# Altium PCB rotboard.PcbDoc
Units mil, origin at the board's own origin, x right, y up, seen from the top; angles counter-clockwise.
Board outline 2010.03 x 1514.83 mil, 2 copper layers (Top Layer, Bottom Layer); 16 components, 9 nets, 59 pads, 17 vias.
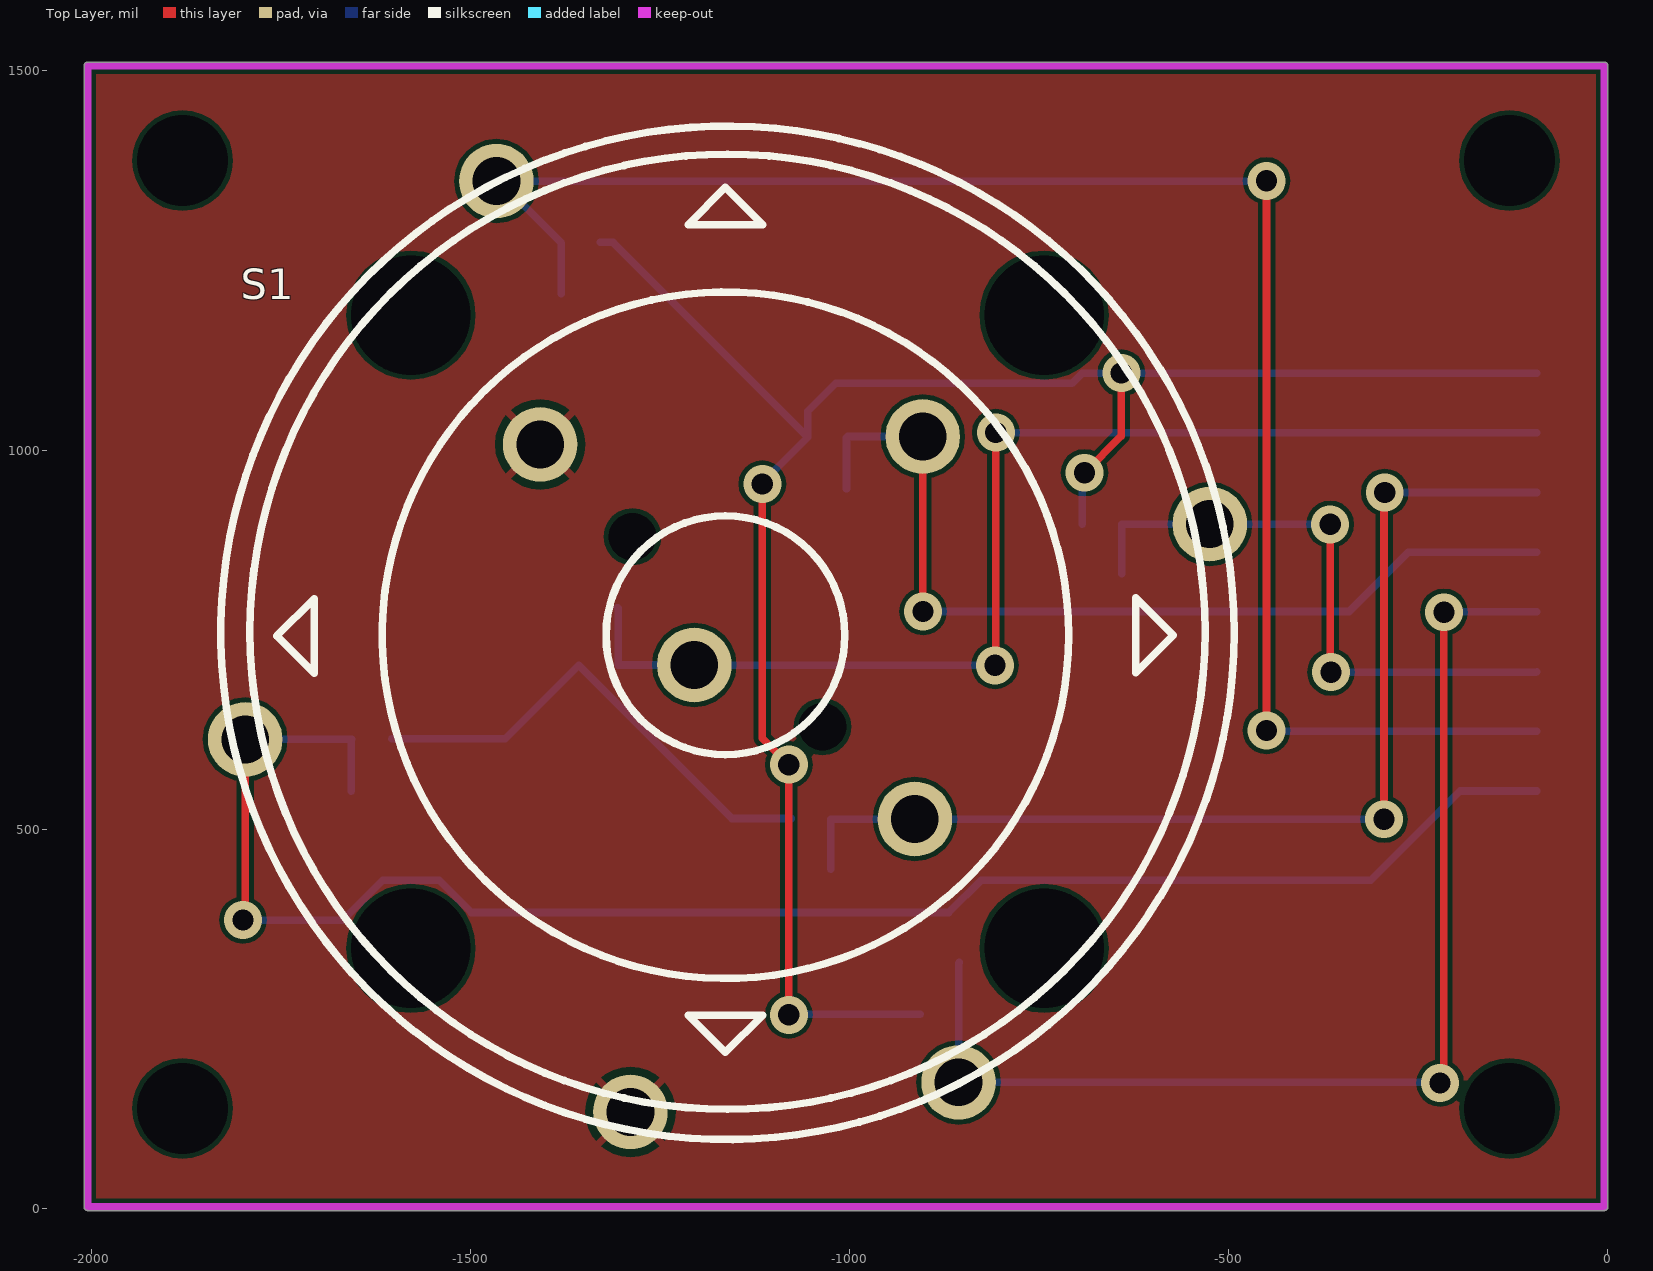
[diagram p0: Top Layer view]
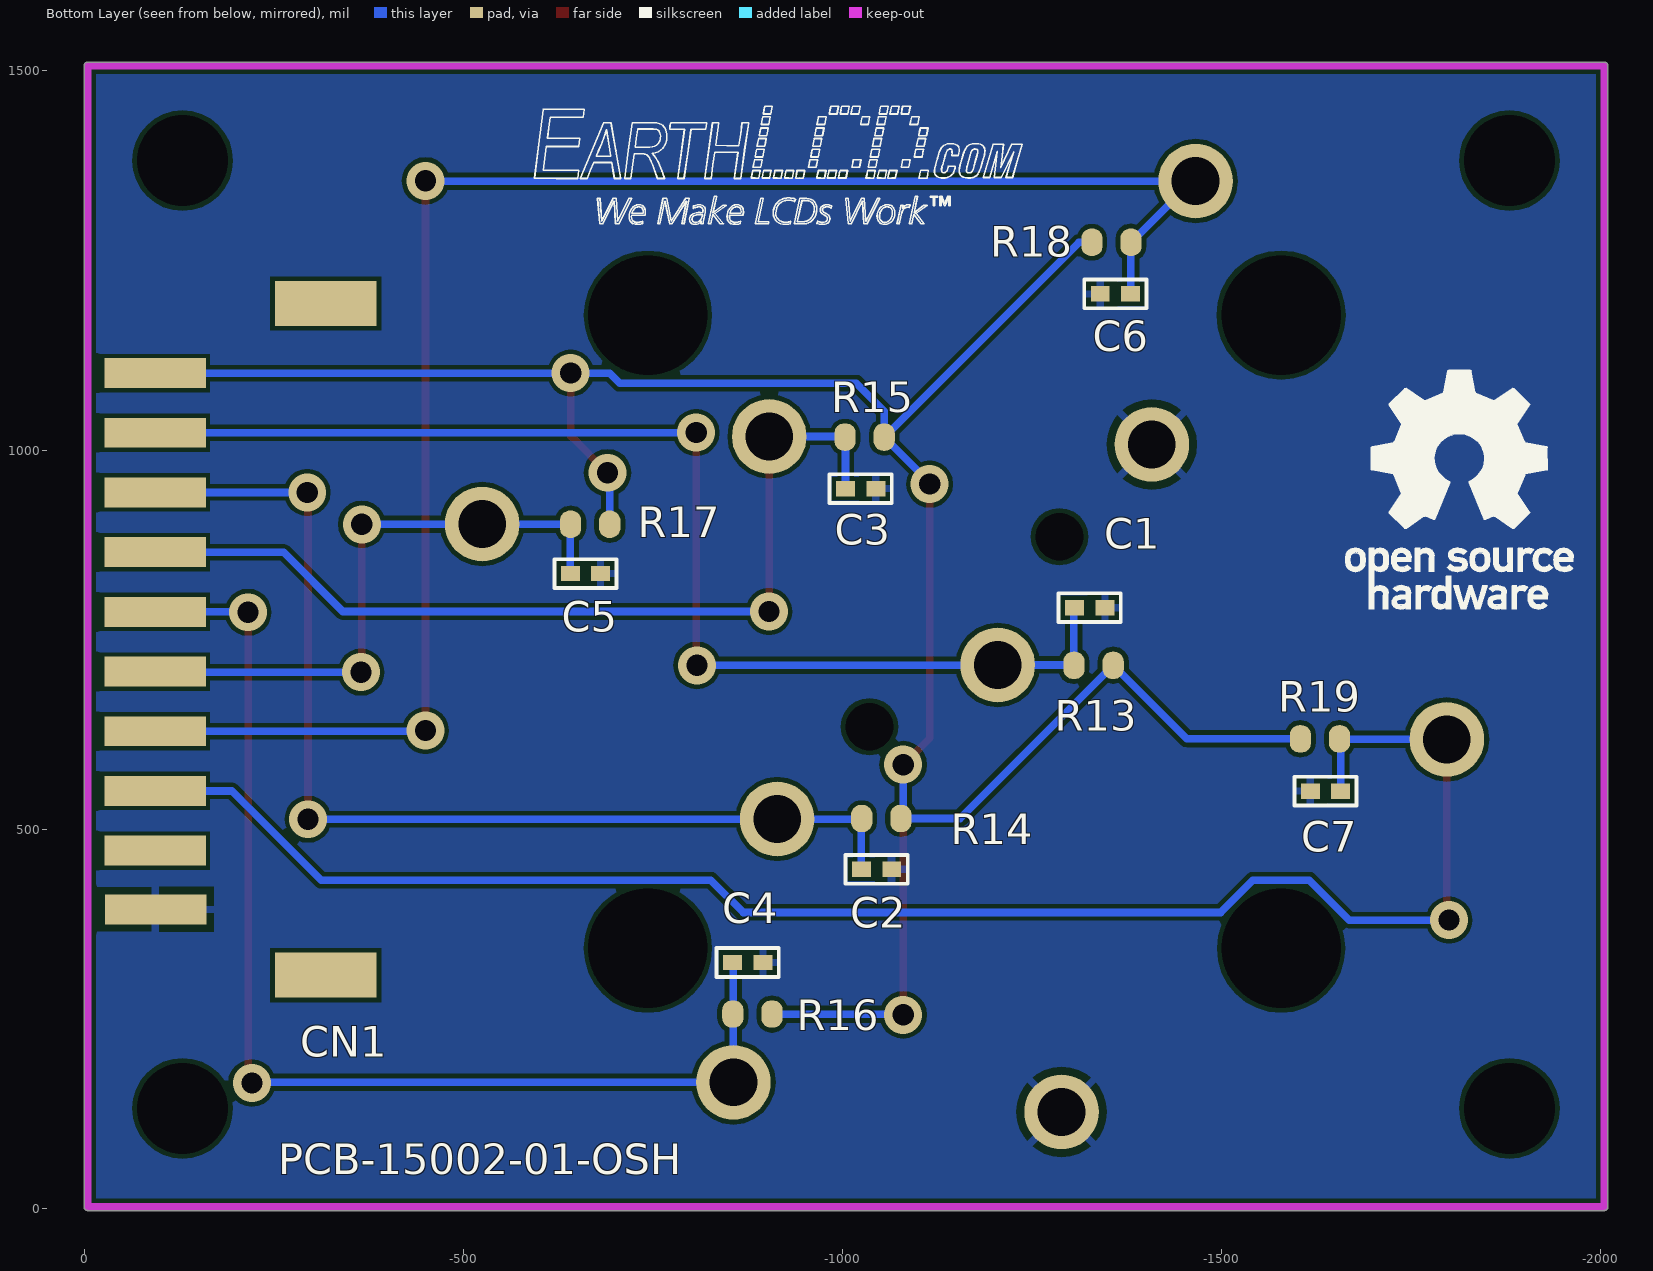
[diagram p1: Bottom Layer view, seen from below]
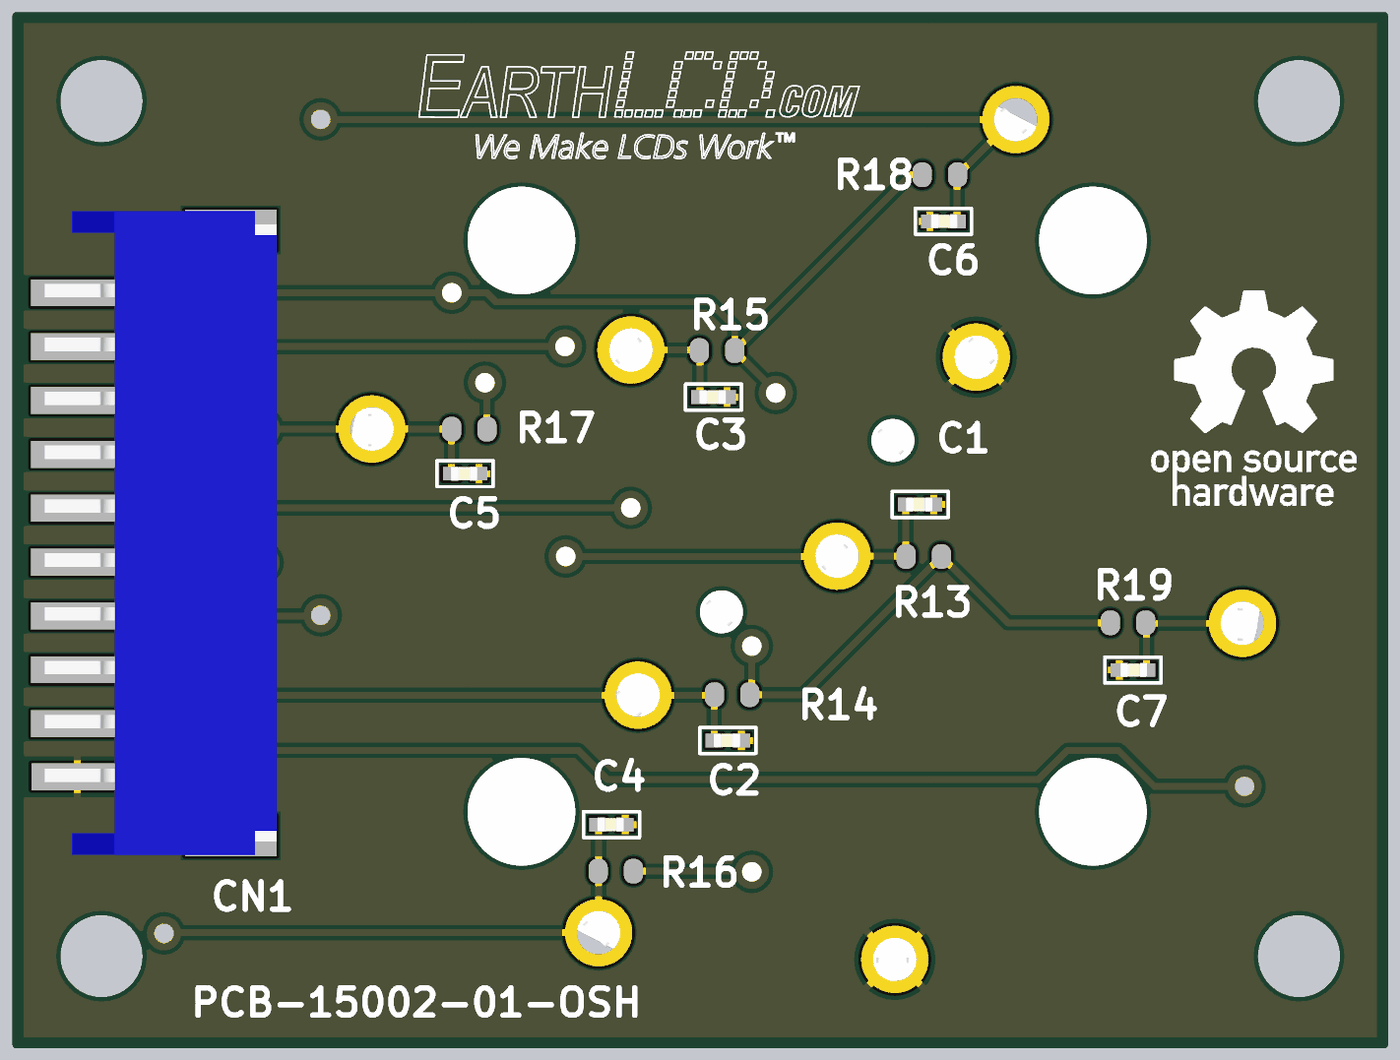
[diagram p2: 3D render of the assembled board from below, using the file's embedded part models]

## Layer stack, top to bottom
Top Solder: solder mask 0.4, Solder Resist, Dk 3.5
Top Layer: signal copper 1.4
Dielectric1: dielectric 12.6, FR-4, Dk 4.8
Bottom Layer: signal copper 1.4
Bottom Solder: solder mask 0.4, Solder Resist, Dk 3.5

## Board outline
-2009.65,1.92 -2009.65,1506.72 cw(c-2004.63,1506.72) -2004.63,1511.74 -4.63,1511.74 cw(c-4.63,1506.72) 0.38,1506.72 0.38,1.92 cw(c-4.63,1.92) -4.63,-3.1 -2004.63,-3.1 cw(c-2004.63,1.92)

## Design rules (kind name [scope] priority, off if disabled: settings)
Clearance [All] p1: gap=6
ComponentClearance [All] p1: gap=5 collisioncheckmode=3 verticalgap=5 showdistances=TRUE
MinimumSolderMaskSliver [All] p1: minsoldermaskwidth=6
PolygonConnect [All] p1: connectstyle=Relief reliefconductorwidth=10 reliefentries=4 polygonreliefangle="90 Angle" airgapwidth=10
RoomDefinition rotboard [InComponentClass('rotboard')] p1: confinementstyle=ConfineIn formatcopy=TRUE lockcomponents=FALSE outline -7777.63,-2698.08 -5777.63,-2698.08 -5777.63,-1698.08 -7777.63,-1698.08
RoutingVias [All] p1: holewidth=28 width=50 viastyle="Through Hole" minholewidth=28 minwidth=50 maxholewidth=28 maxwidth=50
SilkToSolderMaskClearance SilkscreenOverComponentPads [IsPad] p1: minsilkscreentomaskgap=10 clearancetoexposedcopper=TRUE
SolderMaskExpansion [All] p1: expansion=4
Width [All] p1: maxlimit=10 minlimit=10 preferedwidth=10
27 further rules are at their usual default settings.

## Components (designator, comment, footprint, x,y, rotation, side; value= is the part's Value field where it differs from the comment)
C1 ".01uf" 0402C -1306,792 r180 bottom
C2 ".01uf" 0402C -1025,447 r180 bottom
C3 ".01uf" 0402C -1004,949 r180 bottom
C4 ".01uf" 0402C -855,324 r180 bottom
C5 ".01uf" 0402C -641,837 r180 bottom
C6 ".01uf" 0402C -1380,1206 r0 bottom
C7 ".01uf" 0402C -1657,550 r0 bottom
CN1 "S10B-PH" PH-SM4 -94,394 r270 bottom
R13 "*" R0402 -1331,716 r180 bottom
R14 "*" R0402 -1051,514 r180 bottom
R15 "*" R0402 -1029,1017 r180 bottom
R16 "*" R0402 -881,256 r180 bottom
R17 "*" R0402 -667,902 r180 bottom
R18 "*" R0402 -1355,1274 r0 bottom
R19 "*" R0402 -1630,619 r0 bottom
S1 "TSWB-3N-CB111 LFS" "TSWB-3N-CB111 LFS" -1170.63,751.72 r0 top

## Footprints (in the part's own frame and the unit in brackets; to place one, negate y for a bottom-side part, rotate by r counter-clockwise, add the part's x,y. Pads: shape width x height; smd on the part's side, far side on the other; paste and mask are expansions set on the pad)
0402C [mil]
  rect 25x20 smd: 1(0,0) 2(40,0)
  silkscreen extent -21,-19 61,19, body extent -1,-10 38,10, height 14
PH-SM4 [mm]
  rect 1x3.4 smd: 1(0,0) 2(-1.97,-0.016) 3(-3.97,-0.016) 4(-5.97,-0.016) 5(-7.97,-0.016) 6(-9.97,-0.016) 7(-11.97,-0.016) 8(-13.97,-0.016) 9(-15.97,-0.016) 10(-17.97,-0.016)
  rect 1.5x3.4 smd: 11(-20.3,5.7) 12(2.2,5.7)
  body extent -21,-1.2 2.9,7.4, height 5.6
R0402 [mil] "R0402"
  rrect90% 28x36 smd: 1(-25.59,0) 2(26,0)
"TSWB-3N-CB111 LFS" [mm] "TSWB-3N-CB111 LFS"
  round 0 hole 4 unplated: 9(-10.36,10.825) 10(10.853,10.825) 11(10.853,-10.389) 12(-10.36,-10.389)
  round 0 hole 1.6 unplated: 17(-2.935,3.4) 18(3.429,-2.964)
  round 2.5 hole 1.6: A(6.522,-6.058) B(6.787,6.759) COM_A(-6.029,6.494) COM_B(-3.006,-15.869) S1(-0.867,-0.896) S2(7.99,-14.879) S3(16.404,3.824) S4(-7.496,15.315) S5(-15.911,-3.388)
  silkscreen extent -16.72,-16.79 17.22,17.16, body extent -23.93,-24.08 24.59,24.44, height 6.5

## Part data
C1 C2 C3 C4 C5 C6 C7: library part C-USC0402
R13 R14 R15 R16 R17 R18 R19: library part R-US_R0805, "Resistor 0805"

## Free pads (board coordinates)
  round 0 hole 120 unplated: 26(-1879.63,1381.72) 27(-129.63,1381.72) 28(-129.63,131.72) 29(-1879.63,131.72)

## Via types
v1: diameter 50, hole 28, Top Layer to Bottom Layer, tented both sides, 17 vias

## Nets (pads, with @x,y where several pads share a name; then routed paths per layer and width w, separated by ;. In a path a pad name is that pad's centre, name@x,y a point inside that pad or via, vN(x,y) a via of type N, cw(c..) or ccw(c..) an arc to the next point about the centre after c; other vN are vias at no path point)
CENTER: C1.1 CN1.9 R13.1 S1.S1 | length 1594.3
  Top Layer w10: v1(-808,716) -807,717 v1(-807,1023)
  Bottom Layer w10: C1.1 -1304.95,790.95 -1304.95,716.46 S1.S1 -1204.31,716 v1(-808,716) ; v1(-807,1023) -806.74,1022.74 CN1.9
DOWN: C4.1 CN1.6 R16.1 S1.S2 | length 1546.8
  Top Layer w10: v1(-221,165) -216,165 v1(-216,786)
  Bottom Layer w10: C4.1 -856.08,322.92 S1.S2 -219.95,165.95 -219,165 v1(-221,165) ; v1(-216,786) -215.48,786.52 CN1.6
GND: C1.2 C2.2 C3.2 C4.2 C5.2 C6.2 C7.2 CN1.1 S1.COM_A S1.COM_B
LEFT: C7.1 CN1.3 R19.1 S1.S5 | length 2261.3
  Top Layer w10: v1(-1800,380) -1797.04,382.96 S1.S5
  Bottom Layer w10: v1(-1800,380) -1668.14,380 -1615.67,432.46 -1541.33,432.46 -1498.87,390 -868.97,390 -826.51,432.46 -312.54,432.46 -194.7,550.3 CN1.3 ; S1.S5 -1656.26,618.33 -1657,617.59 C7.1
RIGHT: C5.1 CN1.5 R17.1 S1.S3 | length 807.9
  Top Layer w10: v1(-366,902) -366,708 v1(-365,707)
  Bottom Layer w10: C5.1 -641.13,837.12 -641.13,902.28 S1.S3 -366.28,902.28 v1(-366,902) ; v1(-365,707) -94.15,707 CN1.5
ROT1: C2.1 CN1.8 R14.1 S1.A | length 1430.2
  Top Layer w10: v1(-295,513) -295,943 v1(-294,944)
  Bottom Layer w10: C2.1 -1025,512.88 -1024.65,513.24 S1.A -294.24,513.24 -294,513 v1(-295,513) ; v1(-294,944) CN1.8
ROT2: C3.1 CN1.7 R15.1 S1.B | length 1241.6
  Top Layer w10: S1.B -903.41,787.41 v1(-903,787)
  Bottom Layer w10: C3.1 -1004,1016.41 R15.1 -1002.59,1017.82 S1.B ; v1(-903,787) -341,787 -263,865 -93.63,865 CN1.7
UP: C6.1 CN1.4 R18.1 S1.S4 | length 2280.2
  Top Layer w10: v1(-450,630) v1(-450,1355)
  Bottom Layer w10: S1.S4 S1.S4@-1461.26,1354.67 ; C6.1 -1380,1273.41 R18.1 S1.S4@-1461.26,1354.67 ; v1(-450,630) -449.04,629.04 CN1.4 ; v1(-450,1355) -450.33,1354.67 S1.S4@-1461.26,1354.67
VCC: CN1.10 R13.2 R14.2 R15.2 R16.2 R17.2 R18.2 R19.2 | length 3315.8
  Top Layer w10: v1(-1115,955) -1115,620 v1(-1080,585) v1(-1080,255) ; v1(-690,970) -641.48,1018.52 v1(-641.48,1101.48)
  Bottom Layer w10: R19.2 -1454,619 R13.2 -1155,514 R14.2 -1080,517 v1(-1080,585) ; R18.2 -1312,1274 R15.2 ; v1(-1115,955) -1115,957 R15.2 ; v1(-1080,255) -1079,256 R16.2 ; R17.2 -693,967 v1(-690,970) ; CN1.10 v1(-641.48,1101.48) -692.83,1101.48 -706.17,1088.15 -1018.15,1088.15 -1055,1051.3 R15.2
pads on no net: CN1.2 CN1.11 CN1.12 S1.9 S1.10 S1.11 S1.12 S1.17 S1.18

## Polygon pours and split planes (outlines as drawn)
GND on Bottom Layer "Keep-Out Layer-No Net" (solid, remove dead copper, pour order 2): -4.63,1512.15 -5.05,1511.74 -2004.63,1511.74 -2004.63,6.93 -2009.65,1.92 -2005.81,-1.92 -0.8,-1.92 -0.8,1505.55 0.38,1506.72
GND on Top Layer "Keep-Out Layer-No Net" (solid, remove dead copper, pour order 4): -0.21,1508.64 -3.3,1511.74 -2004.63,1511.74 -2004.63,1.92 -2008.47,-1.92 -2007.3,-3.1 -4.63,-3.1 -4.63,1512.15

## Keep-outs
Keep-Out Layer:
  lines w10: -2004.63,1.92 -2004.63,1506.72 -4.63,1506.72 -4.63,1.92 -2004.63,1.92

## Silkscreen, mask and mechanical layers (free items; w line width, h text height)
Bottom Overlay:
  drawing of 1761 lines, arcs and shapes, not listed
  text "PCB-15002-01-OSH" at -256,45 h40
Mechanical 1:
  circle w0.5: c-2005.51,-67.46 r0.06
  circle w0.5: c-2003.76,-67.46 r0.06
  circle w0.5: c-2003.76,-68.7 r0.06
  circle w0.5: c-2005.51,-68.71 r0.06
  circle w0.5: c-2004.8,-68.09 r0.63
  circle w0.5: c-2004.8,-68.09 r0.63
  lines w0.5: -2005.63,-68.83 -2005.63,-67.33 -2003.63,-67.33 -2003.63,-68.83 -2005.63,-68.83